# Altium PCB RT_SUPER_MK84.PCBdoc (part 2 of 2)
Units mil, origin at the board's own origin, x right, y up, seen from the top; angles counter-clockwise.
Board outline 1499.94 x 1499.94 mil, 4 copper layers (Top Layer, GND, PWR, Bottom Layer), stack 39.556 mil thick; 182 components, 120 nets, 536 pads, 0 vias.
Unrouted connection lines stored in the file: 317.
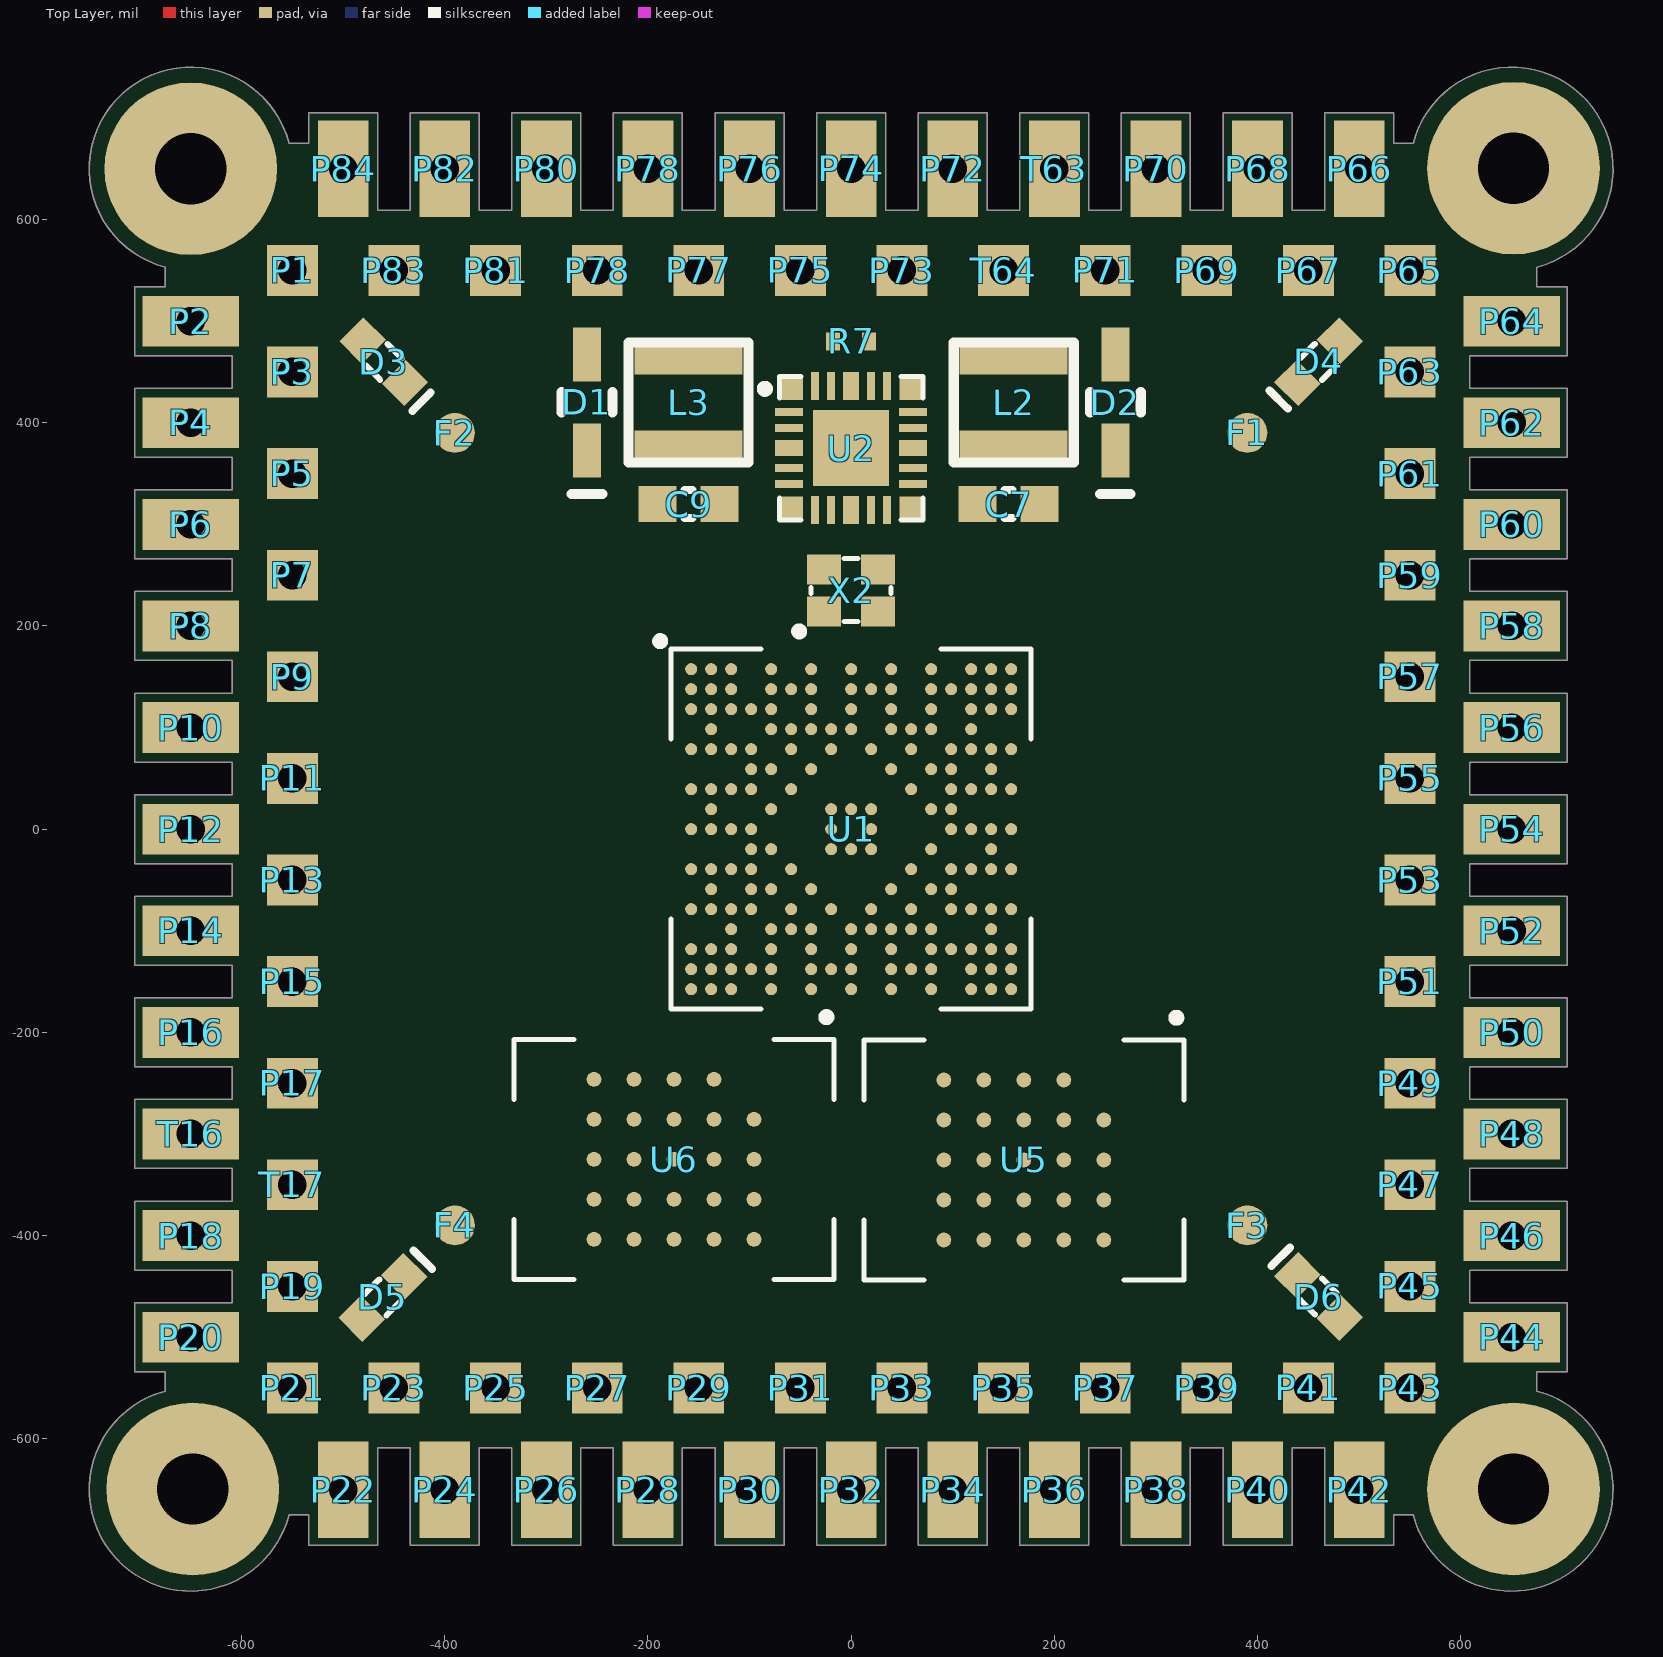
[diagram p0: Top Layer view]

## Nets (pads, with @x,y where several pads share a name; then routed paths per layer and width w, separated by ;. In a path a pad name is that pad's centre, name@x,y a point inside that pad or via, vN(x,y) a via of type N, cw(c..) or ccw(c..) an arc to the next point about the centre after c; other vN are vias at no path point) (continued)
GND: C1.1 C2.2 C3.1 C4.1 C5.2 C6.1 C7.1 C8.2 C9.1 C10.1 C11.1 C12.1 C13.1 C14.1 C15.1 C16.1 C17.1 C18.1 C19.1 C20.1 C21.1 C22.1 C23.1 C24.1 C25.1 C26.1 C27.1 C28.1 C29.1 C30.1 C31.1 C32.1 C33.1 C34.1 C35.1 C36.1 C37.1 C38.1 C39.1 C40.1 C41.1 C42.2 C43.2 C44.2 C45.2 D3.C D4.C J1.5 J2.3 J2.5 J2.9 P60.1 pad.2 R1.1 R15.1 R17.1 R18.1 U1.C2 U1.C3 U1.D5 U1.D12 U1.D15 U1.E12 U1.E14 U1.F7 U1.F11 U1.G6 U1.G12 U1.H8 U1.H9 U1.H10 U1.J8 U1.J10 U1.K8 U1.K9 U1.K10 U1.L6 U1.L12 U1.M7 U1.M11 U1.M13 U1.N14 U1.P13 U2.9 U2.21 U2.23 U2.24 U2.25 U3.3 U4.1 U6.B3 U6.C1 U6.E5
HS_SPI_MISO: P16.1 U1.M2
HS_SPI_MOSI: P17.1 U1.N1
HS_SPI_SCK: P15.1 U1.L2
HS_SPI_SSEL0: T16.1 U1.N2
I3C0_PUR: R16.1 U1.B6
I3C0_SCL: P47.1 U1.N17
I3C0_SDA: P46.1 R16.2 U1.P16
ISP0: R12.1 R15.2 T17.1 U1.N3
ISP1: P18.1 R13.1 R17.2 U1.M4
ISP2: P19.1 R14.1 R18.2 U1.N4
MCLK: P54.1 U1.K16
NetC1_2: C1.2 D1.2 D2.2 U2.16
NetC2_1: C2.1 C5.1 C8.1 U2.2 U2.17 U2.20
NetC7_2: C7.2 L2.2 R7.1 U2.19
NetC9_2: C9.2 L3.2 R10.1 U2.3
NetC11_2: C11.2 U1.B14 X2.3
NetC19_2: C19.2 U1.B13 X2.1
NetC44_1: C44.1 U1.B17 X1.2
NetC45_1: C45.1 U1.A17 X1.1
NetD3_A: D3.A R19.1
NetD4_A: D4.A R20.1
NetL2_1: L2.1 U2.22
NetL3_1: L3.1 U2.1
NetR1_2: R1.2 U1.A16
NetR11_2: R11.2 U6.A4
NetR22_1: R22.1 U2.15
NetTP1_1: TP1.1 U6.C2
PDM_CLK01: P25.1 U1.R1
PDM_CLK23: P27.1 U1.U1
PDM_CLK45: P29.1 U1.R2
PDM_CLK67: P31.1 U1.T2
PDM_DATA01: P24.1 U1.U2
PDM_DATA23: P26.1 U1.R3
PDM_DATA45: P28.1 U1.P3
PDM_DATA67: P30.1 U1.P5
PIO0_19: R19.2 U1.A1
PIO2_4: P40.1 U1.T13
PIO2_5: P41.1 U1.U13
PIO2_6: P45.1 U1.U15
PMIC_INTB: R2.1 U1.A15 U2.10
PMIC_MODE0: U1.C15 U2.7
PMIC_MODE1: U1.B16 U2.8
PMIC_ON: P58.1 U2.4
PMIC_RESETN: R5.1 U1.B15 U2.11 U3.4
PMIC_SCL: R3.1 U1.E16 U2.5
PMIC_SDA: R4.1 U1.F16 U2.6
RED_LED: R20.2 U1.B3
RST_3V3: J1.3 J2.10 P55.1 R8.1 R11.1 U3.2
SD_CLK: P37.1 U1.P10
SD_CMD: P32.1 U1.R9
SD_D0: P33.1 U1.R11
SD_D1: P34.1 U1.T11
SD_D2: P35.1 U1.U11
SD_D3: P36.1 U1.T12
SD_DETECT_N: P39.1 U1.R13
SD_RESET_N: P38.1 U1.T15
SWCLK: J1.4 J2.4 U1.L17
SWIO: J1.2 J2.2 U1.L15
SWO: J1.6 J2.6 U1.L16
TEMP_SENSE: P57.1 U2.14
VDD_CORE: C26.2 C27.2 C28.2 C29.2 C30.2 C31.2 C32.2 C33.2 C34.2 C35.2 R7.2 U1.C5 U1.D9 U1.F14 U1.J4 U1.J14 U1.P9 U1.R5 U1.R14
VDDIO0: U1.F5 U1.H5 U1.K5 U1.M5 U1.N6 U1.N8 U1.N10
pads on no net: D5.A D5.C D6.A D6.C F1.1 F2.1 F3.1 F4.1 F5.1 F6.1 F7.1 F8.1 J1.A J1.B J1.C J2.7 J2.8 J2.A P1.1 P2.1 P20.1 P21.1 P22.1 P42.1 P43.1 P44.1 P64.1 P65.1 P66.1 P84.1 U1.A7 U1.B2 U1.C1 U1.E2 U1.F4 U1.G3 U1.G15 U1.J15 U1.M14 U1.N15 U1.T1 U1.T3 U1.T16 U1.U16 U1.U17 U3.1 U5.A2 U5.A4 U5.A5 U5.B1 U5.B3 U5.B4 U5.B5 U5.C1 U5.C2 U5.C5 U5.D1 U5.E4 U5.E5 U6.A2 U6.A5 U6.B1 U6.B5 U6.C5 X2.2 X2.4

## Polygon pours and split planes (outlines as drawn)
+3v3 on PWR "+3V3_L03_P003" (solid, remove dead copper, pour order 3): -874.25,-788 779,-788 779,769 -874.25,769
VDD_CORE on PWR "VDD_CORE_L03_P002" (solid, remove dead copper, pour order 2): -366.38,-125.75 -366.38,3.19 -472.68,3.19 -472.68,483 182.83,483 182.83,355 -150.83,355 -150.83,212.83 -150.83,-124.76
GND on GND "GND_L02_P000" (solid, remove dead copper, pour order 0): -1118.35,896.89 -1118.35,-916.1 840,-916.1 840,896.89
GND on Bottom Layer "GND_L04_P004" (solid, remove dead copper, pour order 4): -859,860 -859,-932 779,-932 779,860

## Keep-outs
Keep-Out Layer:
  lines w1: -705,-534 -705,-466 -609,-466 -609,-434 -705,-434 -705,-366 -609,-366 -609,-334 -705,-334 -705,-266 -609,-266 -609,-234 -705,-234 -705,-166 -609,-166 -609,-134 -705,-134 -705,-66 -609,-66 -609,-34 -705,-34 -705,34 -609,34 -609,66 -705,66 -705,134 -609,134 -609,166 -705,166 -705,234 -609,234 -609,266 -705,266 -705,334 -609,334 -609,366 -705,366 -705,434 -609,434 -609,466 -705,466 -705,534 -674.96,534 -674.96,553.16 cw(c-650,650) -553.16,674.96 -534,674.96 -534,705 -466,705 -466,609 -434,609 -434,705 -366,705 -366,609 -334,609 -334,705 -266,705 -266,609 -234,609 -234,705 -166,705 -166,609 -134,609 -134,705 -66,705 -66,609 -34,609 -34,705 34,705 34,609 66,609 66,705 134,705 134,609 166,609 166,705 234,705 234,609 266,609 266,705 334,705 334,609 366,609 366,705 434,705 434,609 466,609 466,705 534,705 534,675 553.16,675 553.16,674.96 cw(c650,650) 674.96,553.16 674.96,534 705,534 705,466 609,466 609,434 705,434 705,366 609,366 609,334 705,334 705,266 609,266 609,234 705,234 705,166 609,166 609,134 705,134 705,66 609,66 609,34 705,34 705,-34 609,-34 609,-66 705,-66 705,-134 609,-134 609,-166 705,-166 705,-234 609,-234 609,-266 705,-266 705,-334 609,-334 609,-366 705,-366 705,-434 609,-434 609,-466 705,-466 705,-534 675,-534 675,-553.16 674.96,-553.16 cw(c650,-650) 553.16,-674.96 553.16,-675 534,-675 534,-705 466,-705 466,-609 434,-609 434,-705 366,-705 366,-609 334,-609 334,-705 266,-705 266,-609 234,-609 234,-705 166,-705 166,-609 134,-609 134,-705 66,-705 66,-609 34,-609 34,-705 -34,-705 -34,-609 -66,-609 -66,-705 -134,-705 -134,-609 -166,-609 -166,-705 -234,-705 -234,-609 -266,-609 -266,-705 -334,-705 -334,-609 -366,-609 -366,-705 -434,-705 -434,-609 -466,-609 -466,-705 -534,-705 -534,-675 -553.16,-675 -553.16,-674.96 cw(c-650,-650) -674.96,-553.16 -674.96,-534 -705,-534

## Silkscreen, mask and mechanical layers (free items; w line width, h text height)
Top Overlay:
  text "40" at 1610,1030 h50
  text "1" at 1820,1020 h50
  text "76" at 2015,1005 h50
  text "58" at 1675,970 h50
  text "59" at 1670,965 h50
  text "2" at 1830,960 h50
  text "39" at 2030,555 h50
  text "20" at 1860,545 h50
  text "21" at 1900.32,500 h50
Bottom Overlay:
  text "W" at -1421,1123 h300
  text "Super Monkey" at -39,390 h125
  text "RT685 Audio Platorm" at -21.17,305.5 h75
  text "M" at 491,99 h700
  text "REV C" at 356,-33 h175
  text "2022-01-06" at -108,-438 h80
[8] Board Outline:
  drawing of 303 lines, arcs and shapes, not listed